# Altium PCB untitled.PcbDoc
Units mil, origin at the board's own origin, x right, y up, seen from the top; angles counter-clockwise.
Board outline 3012.01 x 3149.61 mil, 2 copper layers (Top, Bottom), stack 61.811 mil thick; 37 components, 55 nets, 177 pads, 57 vias.
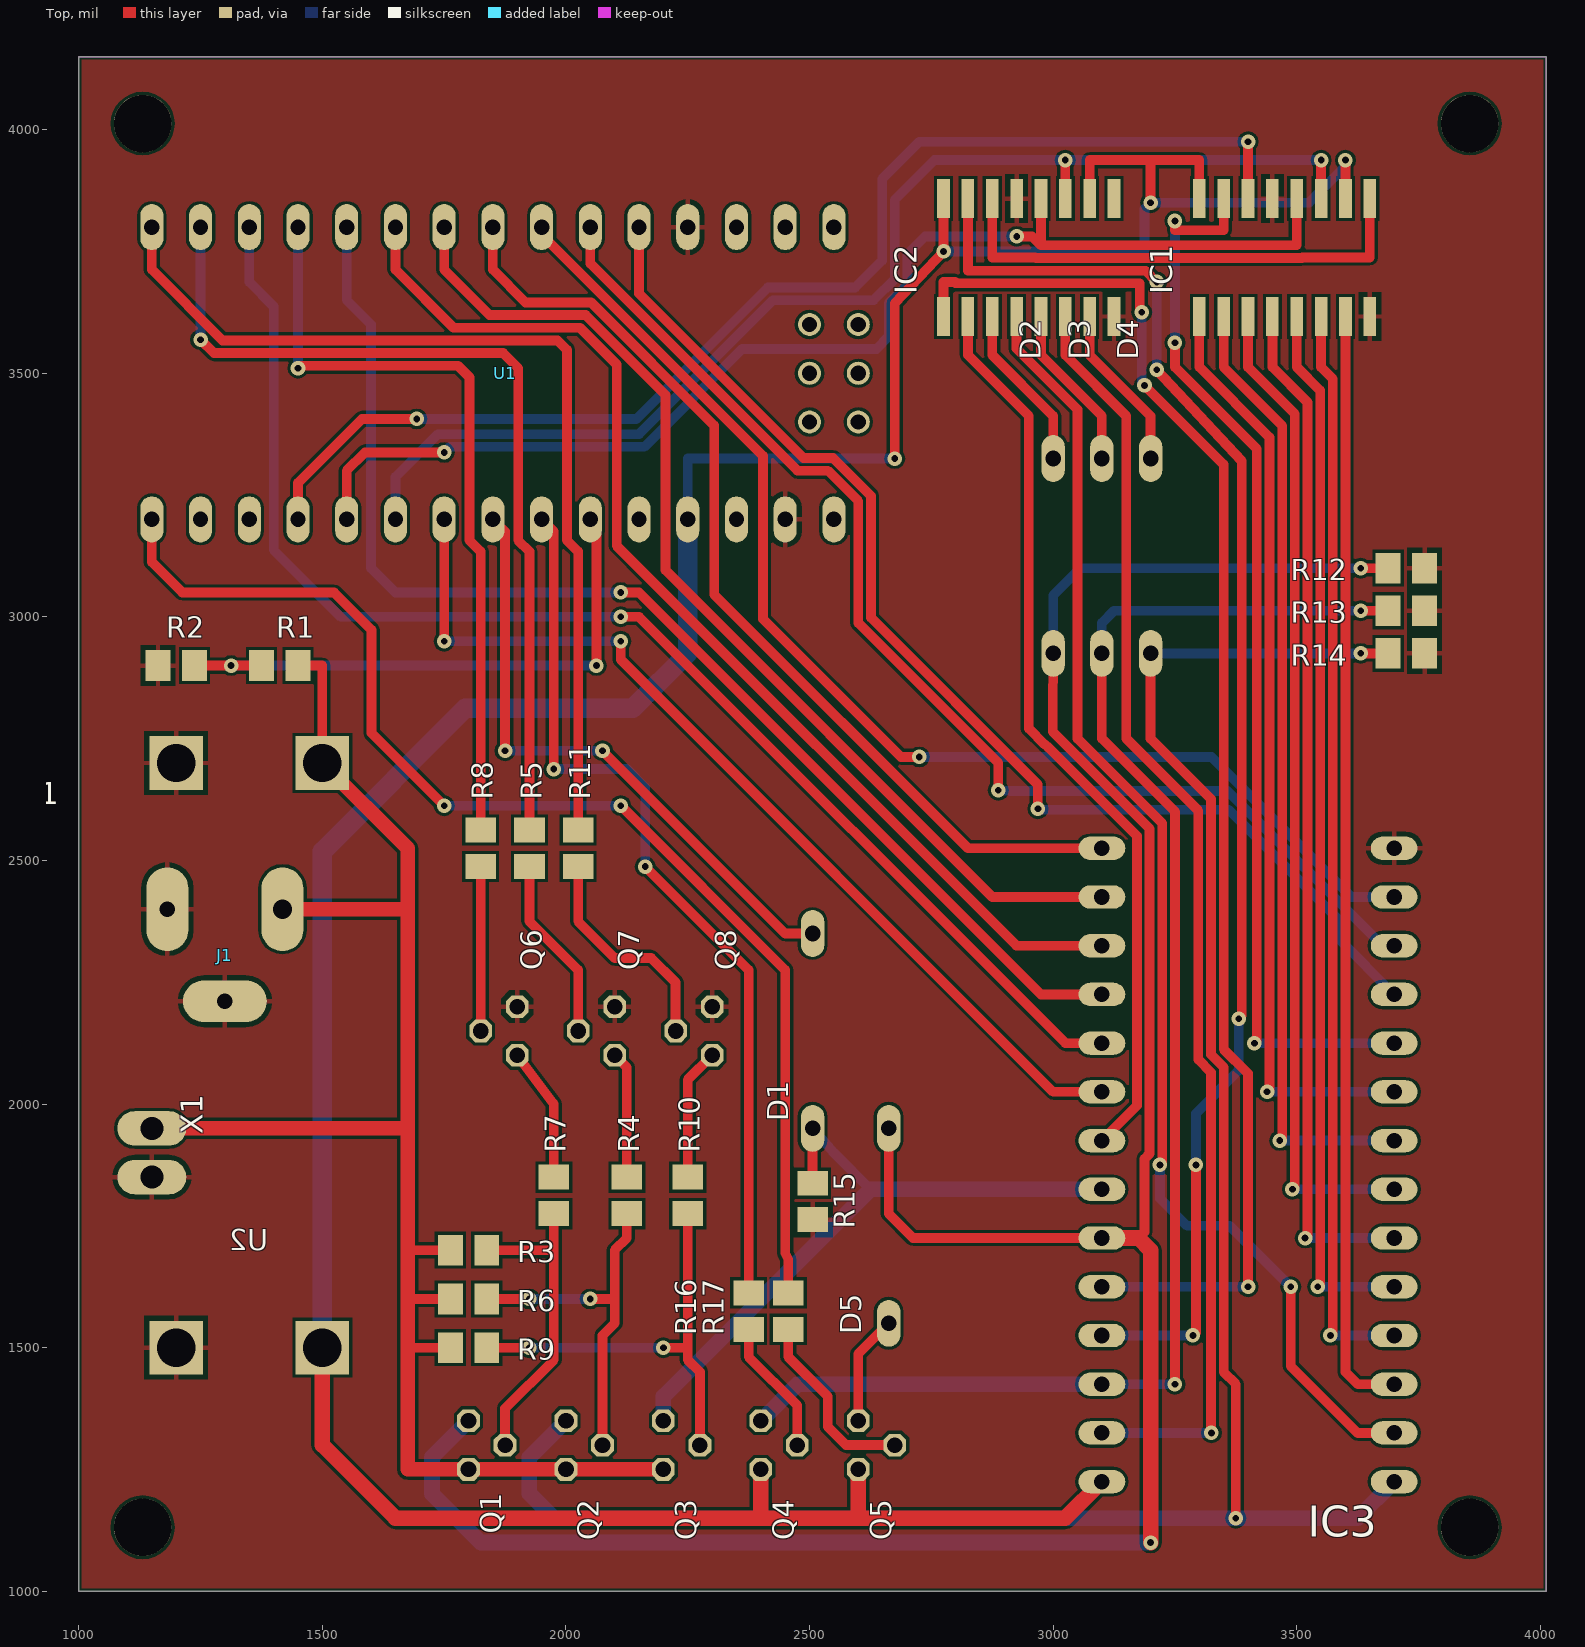
[diagram p0: Top view]
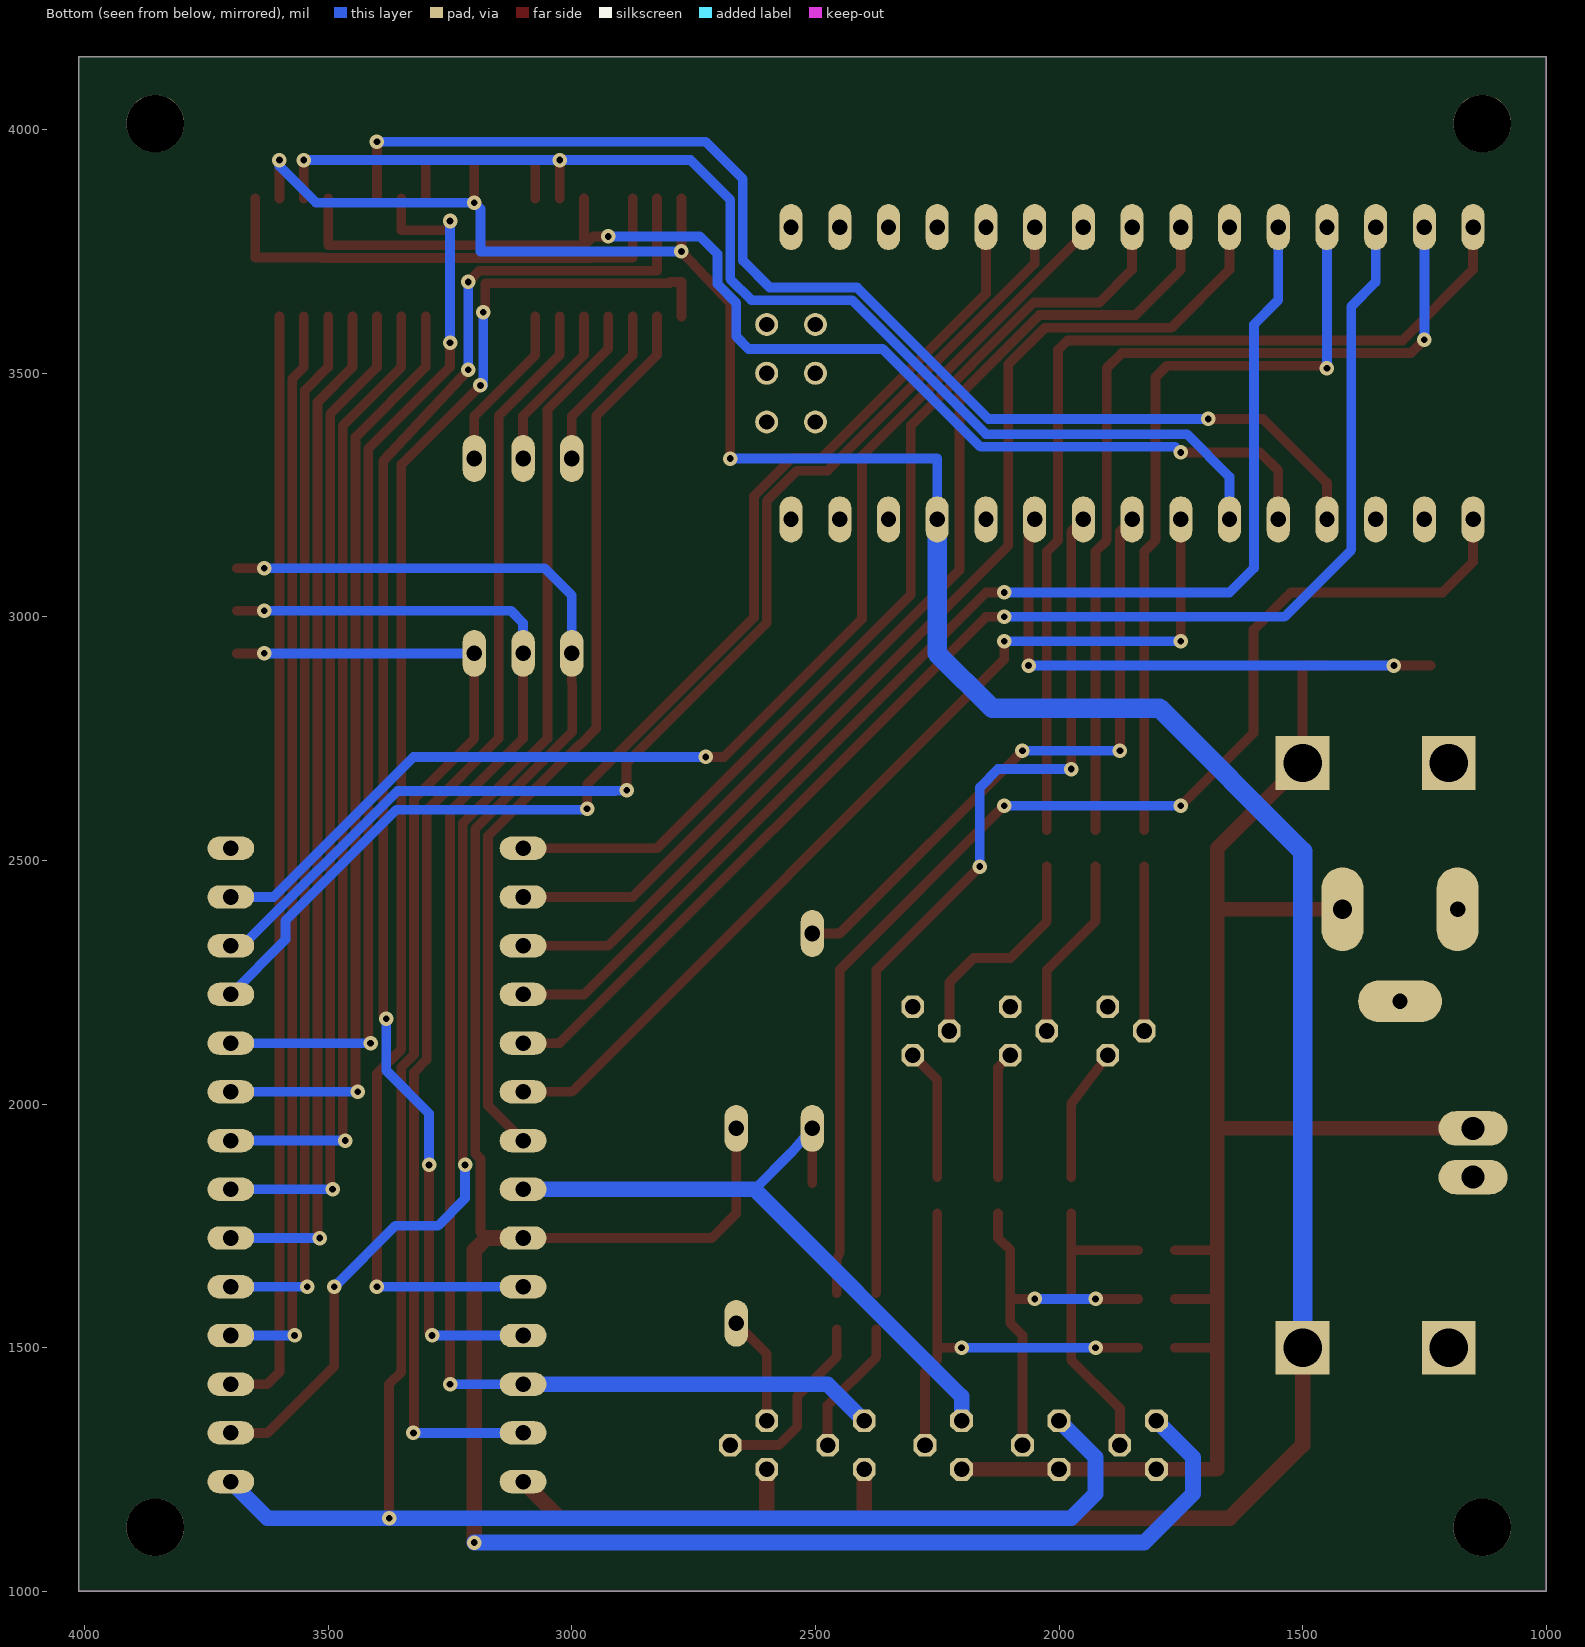
[diagram p1: Bottom view, seen from below]

## Layer stack, top to bottom
Top Solder: solder mask 0.4, Solder Resist, Dk 3.5
Top: signal copper 1.378
Dielectric 1: core 59.0551, FR-4, Dk 4.8
Bottom: signal copper 1.378
Bottom Solder: solder mask 0.4, Solder Resist, Dk 3.5

## Board outline
1000,1000 4012.01,1000 4012.01,4149.61 1000,4149.61

## Design rules (kind name [scope] priority, off if disabled: settings)
Clearance [All] p1: gap=6 ignorepadtopadclearanceinfootprint=FALSE except(0: SMDPad-SMDPad SMDPad-THPad SMDPad-Via)
Clearance "Clearance (Same Net)" [All] p2: gap=0 ignorepadtopadclearanceinfootprint=FALSE except(6: SMDPad-SMDPad SMDPad-THPad SMDPad-Via)
HoleSize HoleSize_1 [All] p1: absolutevalues=TRUE maxlimit=100000 minlimit=13.78 maxpercent=80.000 minpercent=20.000
HoleSize [All] p2: absolutevalues=TRUE maxlimit=100 minlimit=1 maxpercent=80.000 minpercent=20.000
HoleToHoleClearance mdViaViaSameLayer [All] p1: gap=6 allowstackedmicrovias=TRUE
HoleToHoleClearance [All] p2: gap=10 allowstackedmicrovias=TRUE
PasteMaskExpansion mlMinCreamFrame [All] p1: expansion=0
PasteMaskExpansion [All] p2: expansion=0
PolygonConnect ThermalVias [IsVia] p1: connectstyle=Direct reliefconductorwidth=10 reliefentries=4 polygonreliefangle="90 Angle" airgapwidth=10
PolygonConnect [All] p2: connectstyle=Relief reliefconductorwidth=10 reliefentries=4 polygonreliefangle="90 Angle" airgapwidth=10
RoutingVias [All] p1: holewidth=28 width=50 viastyle="Through Hole" minholewidth=28 minwidth=50 maxholewidth=28 maxwidth=50
SilkToSilkClearance [All] p1 off: silktosilkclearance=10
SilkToSolderMaskClearance [IsPad] p1 off: minsilkscreentomaskgap=10 clearancetoexposedcopper=TRUE
SolderMaskExpansion mlMinStopFrame [All] p1: expansion=4
SolderMaskExpansion [All] p2: expansion=4
Width Width_1 [All] p1: maxlimit=100000 minlimit=6 preferedwidth=10
Width [All] p2: maxlimit=10 minlimit=10 preferedwidth=10
25 further rules are at their usual default settings.

## Components (designator, comment, footprint, x,y, rotation, side; value= is the part's Value field where it differs from the comment)
D1 "" DO35-10 2506.25,2150 r90 top
D2 "" DO35-10 3000,3125 r90 top
D3 "" DO35-10 3100,3125 r90 top
D4 "" DO35-10 3200,3125 r90 top
D5 "" DO35-10 2662.5,1750 r270 top
IC1 "74HC595D" SO16 3475,3737.5 r0 top
IC2 "74HC595D" SO16 2950,3737.5 r0 top
IC3 "" DIL28 3400,1875 r90 top
J1 "" SPC4078 1300,2400 r0 top
Q1 "BC557" TO92 1800,1300 r270 top
Q2 "" TO92 2000,1300 r270 top
Q3 "" TO92 2200,1300 r270 top
Q4 "" TO92 2400,1300 r270 top
Q5 "" TO92 2600,1300 r270 top
Q6 "BC547" TO92 1900,2150 r90 top
Q7 "" TO92 2100,2150 r90 top
Q8 "" TO92 2300,2150 r90 top
R1 "" M0805 1412.5,2900 r180 top
R2 "" M0805 1200,2900 r180 top
R3 "22K" M0805 1800,1700 r180 top
R4 "" M0805 2125,1812.5 r270 top
R5 "22K" M0805 1925,2525 r90 top
R6 "" M0805 1800,1600 r180 top
R7 "" M0805 1975,1812.5 r90 top
R8 "" M0805 1825,2525 r270 top
R9 "" M0805 1800,1500 r180 top
R10 "" M0805 2250,1812.5 r90 top
R11 "" M0805 2025,2525 r270 top
R12 "4.7K" M0805 3725,3100 r0 top
R13 "" M0805 3725,3012.5 r0 top
R14 "" M0805 3725,2925 r0 top
R15 "4.7K" M0805 2506.25,1800 r270 top
R16 "300" M0805 2375,1575 r270 top
R17 "" M0805 2456.25,1575 r270 top
U1 "" NANO 2200,3600 r90 top
U2 "DC-DC-STEP-UP-MT3608" DC-DC-STEP-UP-MT3608 1350,2100 r270 top
X1 "" 2POL254 1150,1900 r270 top

## Footprints (in the part's own frame and the unit in brackets; to place one, negate y for a bottom-side part, rotate by r counter-clockwise, add the part's x,y. Pads: shape width x height; smd on the part's side, far side on the other; paste and mask are expansions set on the pad)
2POL254 [mil] "2POL254"
  oval 70.86x141.72 hole 47.24: 1(-50,0) 2(50,0)
DC-DC-STEP-UP-MT3608 [mm] "DC-DC-STEP-UP-MT3608"
  rect 2.8x2.8 hole 2: IN+(15.24,3.81) IN-(15.24,-3.81) OUT+(-15.24,3.81) OUT-(-15.24,-3.81)
DIL28 [mil] "DIL28"
  oval 48x96 hole 32: 1(-650,-300) 2(-550,-300) 3(-450,-300) 4(-350,-300) 5(-250,-300) 6(-150,-300) 7(-50,-300) 8(50,-300) 9(150,-300) 10(250,-300) 11(350,-300) 12(450,-300) 13(550,-300) 14(650,-300) 15(650,300) 16(550,300) 17(450,300) 18(350,300) 19(250,300) 20(150,300) 21(50,300) 22(-50,300) 23(-150,300) 24(-250,300) 25(-350,300) 26(-450,300) 27(-550,300) 28(-650,300)
DO35-10 [mil] "DO35-10"
  oval 96x48 hole 32: A(200,0) C(-200,0)
M0805 [mil] "M0805"
  rect 51.18x62.99 smd: 1(-37.4,0) 2(37.4,0)
NANO [mil] "NANO"
  oval 94.5x47.25 hole 31.5: 3.3V(-400,950) 5V(-400,-50) A0(-400,750) A1(-400,650) A2(-400,550) A3(-400,450) A4(-400,350) A5(-400,250) A6(-400,150) A7(-400,50) AREF(-400,850) D2(200,50) D3(200,150) D4(200,250) D5(200,350) D6(200,450) D7(200,550) D8(200,650) D9(200,750) D10(200,850) D11(200,950) D12(200,1050) D13(-400,1050) GND(-400,-250) GND1(200,-50) RAW(-400,-350) RST(-400,-150) RST1(200,-150) RX1(200,-250) TX0(200,-350)
  round 47.25 hole 31.5: ICSP1(-200,-400) ICSP2(-200,-300) ICSP3(-100,-400) ICSP4(-100,-300) ICSP5(0,-400) ICSP6(0,-300)
SO16 [mil] "SO16"
  rect 26x80 smd: 1(-175,-121) 2(-125,-121) 3(-75,-121) 4(-25,-121) 5(25,-121) 6(75,-121) 7(125,-121) 8(175,-121) 9(175,121) 10(125,121) 11(75,121) 12(25,121) 13(-25,121) 14(-75,121) 15(-125,121) 16(-175,121)
SPC4078 [mil] "SPC4078"
  oval 86x172 hole 31.5: 1(-118.11,0)
  oval 172x86 hole 31.5: 2(0,-188.98)
  oval 86x172 hole 39.37: 3(118.11,0)
TO92 [mil] "TO92"
  oct 46.48x46.48 hole 32: 1(50,0) 2(0,75) 3(-50,0)

## Part data
D1 D2 D3 D4 D5: library part DO35-10
IC1 IC2: library part SO16
IC3: library part DIL28
J1: library part SPC4078
Q1 Q2 Q3 Q4 Q5 Q6 Q7 Q8: library part TO92
R1 R2 R3 R4 R5 R6 R7 R8 R9 R10 R11 R12 R13 R14 R15 R16 R17: library part M0805
U1: library part NANO
X1: library part 2POL254

## Free pads (board coordinates)
  round 118.11 hole 118.11: 1(1131.25,1131.25) 1(1131.25,4012.5) 1(3855.02,1131.25) 1(3855.02,4012.5)

## Via types
v1: diameter 29.78/29.78 (per signal layer), hole 13.78, Top to Bottom, 57 vias

## Nets (pads, with @x,y where several pads share a name; then routed paths per layer and width w, separated by ;. In a path a pad name is that pad's centre, name@x,y a point inside that pad or via, vN(x,y) a via of type N, cw(c..) or ccw(c..) an arc to the next point about the centre after c; other vN are vias at no path point)
+24V: J1.3 Q1.1 Q2.1 Q3.1 R1.1 R3.2 R6.2 R9.2 U2.OUT+ X1.1 | length 3342.3
  Top w20: R1.1 1500,2900 U2.OUT+ ; 1675,1500 R9.2 ; 1675,1600 R6.2 ; 1675,1700 R3.2
  Top w30: X1.1 1675,1950 ; J1.3 1675,2400 ; U2.OUT+ 1675,2525 1675,2400 ; Q3.1 Q2.1 Q1.1 1675,1250 1675,1500 1675,1600 1675,1700 1675,1950 ; 1675,1950 1675,2400
A0: IC1.15 IC3.10 | length 2229.5
  Top w20: v1(3250,3562.5) 3250,3512.5 3418,3344.5 3418,2129.89 v1(3413.11,2125) ; v1(3250,3812.5) 3250,3793.75 3350,3793.75 IC1.15
  Bottom w20: v1(3250,3562.5) v1(3250,3812.5) ; v1(3413.11,2125) IC3.10
A1: IC1.1 IC3.9 | length 1914.1
  Top w20: IC1.1 3300,3512.5 3444,3368.5 3444,2029.89 v1(3439.11,2025)
  Bottom w20: v1(3439.11,2025) IC3.9
A2: IC1.2 IC3.8 | length 1978.1
  Top w20: IC1.2 3350,3512.5 3470,3392.5 3470,1929.89 v1(3465.11,1925)
  Bottom w20: v1(3465.11,1925) IC3.8
A3: IC1.3 IC3.7 | length 2042.2
  Top w20: IC1.3 3400,3512.5 3496,3416.5 3496,1829.89 v1(3491.11,1825)
  Bottom w20: v1(3491.11,1825) IC3.7
A4: IC1.4 IC3.6 | length 2106.2
  Top w20: IC1.4 3450,3512.5 3522,3440.5 3522,1729.89 v1(3517.11,1725)
  Bottom w20: v1(3517.11,1725) IC3.6
A5: IC1.5 IC3.5 | length 2170.3
  Top w20: IC1.5 3500,3512.5 3548,3464.5 3548,1629.89 v1(3543.11,1625)
  Bottom w20: v1(3543.11,1625) IC3.5
A6: IC1.6 IC3.4 | length 2234.4
  Top w20: IC1.6 3550,3512.5 3574,3488.5 3574,1529.89 v1(3569.11,1525)
  Bottom w20: v1(3569.11,1525) IC3.4
A7: IC1.7 IC3.3 | length 2276.9
  Top w20: IC1.7 3600,1450 3625,1425 IC3.3
A8: IC2.15 IC3.25 | length 3004.7
  Top w20: IC2.15 2825,3710.5 3189.5,3710.5 v1(3212.5,3687.5) ; v1(3212.5,3506.93) 3387.11,3319.82 3387.11,2181.22 v1(3380.89,2175) ; v1(3286.89,1525) 3293.11,1531.22 v1(3293.11,1875)
  Bottom w20: IC3.25 v1(3286.89,1525) ; v1(3212.5,3506.93) v1(3212.5,3687.5) ; v1(3293.11,1875) 3293.11,1980.61 3380.89,2068.39 v1(3380.89,2175)
A9: IC2.1 IC3.24 | length 2931.7
  Top w20: IC2.1 2775,3687.5 2799,3687.5 2799,3684.5 3177.61,3684.5 3177.61,3629 v1(3181.61,3625) ; v1(3187.5,3475) 3350,3312.5 3350,2112.5 3400,2062.5 v1(3400,1625)
  Bottom w20: IC3.24 v1(3400,1625) ; v1(3181.61,3625) 3181.61,3475 v1(3187.5,3475)
A10: IC2.2 IC3.21 | length 1865.4
  Top w20: IC2.2 2825,3537.5 2950,3412.5 2950,2770.85 2982.6,2738.25 2990,2732 3172,2550 3172,1997 IC3.21
A11: D2.C D5.C IC3.23 Q1.3 R12.1 | length 5162.7
  Top w20: D5.C 2662.5,1775 2712.5,1725 IC3.23 ; D2.C 2999,2801 2999,2764.23 3198,2565.23 3198,1898 3187.5,1887.5 3187.5,1737.5 3175,1725 ; v1(3631.25,3100) R12.1
  Top w32: IC3.23 3175,1725 3200,1700 v1(3200,1100)
  Bottom w20: D2.C 3000,3043.75 3056.25,3100 v1(3631.25,3100)
  Bottom w32: Q1.3 1725,1275 1725,1200 1825,1100 v1(3200,1100)
A12: IC2.4 IC3.2 | length 2711.8
  Top w20: IC2.4 2925,3550.73 3050,3425.73 3050,2750 3224,2576 3224,1879.89 v1(3219.11,1875) ; v1(3487.5,1625) 3487.5,1462.5 3625,1325 IC3.2
  Bottom w20: v1(3219.11,1875) 3219.11,1805.89 3275,1750 3362.5,1750 v1(3487.5,1625)
A13: D3.C IC3.26 Q4.3 R13.1 | length 3103.7
  Top w20: D3.C 3100,2750 3250,2600 v1(3250,1425) ; v1(3631.25,3012.5) R13.1
  Bottom w20: IC3.26 v1(3250,1425) ; D3.C 3100,2987.5 3125,3012.5 v1(3631.25,3012.5)
  Bottom w32: Q4.3 2475,1425 IC3.26
A14: IC2.6 IC3.27 | length 2640.8
  Top w20: IC2.6 3025,3537.5 3150,3412.5 3150,2750 3298,2602 3298,2090.96 3324,2064.96 3324,1326 v1(3325,1325)
  Bottom w20: IC3.27 v1(3325,1325)
A15: D4.C IC3.1 Q2.3 R14.1 | length 4342.9
  Top w20: D4.C 3200,2750 3324,2626 3324,2101.73 3350,2075.73 3350,1450 3375,1425 v1(3375,1150) ; v1(3631.25,2925) R14.1
  Bottom w20: D4.C v1(3631.25,2925)
  Bottom w32: Q2.3 1925,1275 1925,1200 1975,1150 v1(3375,1150) 3625,1150 IC3.1
CE: IC3.20 U1.A3 | length 2005.1
  Top w20: v1(1750,2950) U1.A3 ; v1(2112.5,2950) 2112.5,2912.5 3000,2025 IC3.20
  Bottom w20: v1(1750,2950) v1(2112.5,2950)
D0: IC3.11 U1.D2 | length 2480.1
  Top w20: U1.D2 2150,3663.5 2487.5,3326 2548.27,3326 2626,3248.27 2626,2998.27 2968.39,2655.88 2968.39,2606.61 v1(2968.75,2606.25)
  Bottom w20: v1(2968.75,2606.25) 2973,2604.25 3359.71,2604.25 3587.5,2376.46 3587.5,2337.5 IC3.11
D1: IC3.12 U1.D3 | length 2483.6
  Top w20: U1.D3 2050,3725 2475,3300 2537.5,3300 2600,3237.5 2600,2987.5 2887.5,2700 v1(2887.5,2644.11)
  Bottom w20: v1(2887.5,2644.11) 2911.14,2642.75 3357.98,2642.75 3675.73,2325 IC3.12
D2: IC3.13 U1.D4 | length 2524.6
  Top w20: U1.D4 1950,3784.79 2404.25,3330.54 2404.25,2995.75 2687.5,2712.5 v1(2725,2712.5)
  Bottom w20: v1(2725,2712.5) 3325,2712.5 3612.5,2425 IC3.13
D3: IC3.15 U1.D5 | length 2032.8
  Top w20: U1.D5 1850,3712.5 1917.11,3645.39 2051.9,3645.39 2304.25,3393.04 2304.25,3045.75 2825,2525 IC3.15
D4: IC3.16 U1.D6 | length 2181.6
  Top w20: U1.D6 1750,3712.5 1843.11,3619.39 2040.4,3619.39 2204.25,3455.54 2204.25,3095.75 2875,2425 IC3.16
D5: IC3.17 U1.D7 | length 2330.3
  Top w20: U1.D7 1650,3712.5 1769.11,3593.39 2028.9,3593.39 2104.25,3518.04 2104.25,3145.75 2925,2325 IC3.17
D6: IC3.18 U1.D8 | length 2583.1
  Top w20: v1(2112.5,3050) 2150,3050 2975,2225 IC3.18
  Bottom w20: U1.D8 1550,3650 1600,3600 1600,3100 1650,3050 v1(2112.5,3050)
D7: IC3.19 U1.D10 | length 2802.6
  Top w20: v1(2112.5,3000) 2150,3000 3025,2125 IC3.19
  Bottom w20: U1.D10 1350,3687.5 1400,3637.5 1400,3137.5 1537.5,3000 v1(2112.5,3000)
GND: IC1.8 IC1.13 IC2.8 IC2.13 IC3.14 J1.1 J1.2 Q6.1 Q7.1 Q8.1 R2.2 R12.2 R13.2 R14.2 R15.2 U1.GND U1.GND1 U2.IN- U2.OUT- X1.2
N$1: IC1.11 IC2.11 U1.A2 | length 2509.9
  Top w20: IC2.11 v1(3025,3937.5) ; IC1.11 v1(3550,3937.5)
  Bottom w20: U1.A2 1650,3287.5 1737.5,3375 2150,3375 2425,3650 2631.25,3650 2675,3693.75 2675,3856.25 2756.25,3937.5 v1(3025,3937.5) v1(3550,3937.5)
N$2: IC1.12 IC2.12 U1.A1 | length 2525.7
  Top w20: U1.A1 1550,3300 1587.5,3337.5 v1(1750,3337.5) ; v1(2925,3780.89) 2956.61,3780.89 2975,3762.5 ; IC2.12 2975,3762.5 ; IC1.12 3500,3762.5 2975,3762.5
  Bottom w20: v1(1750,3337.5) 1761.5,3349 2160.77,3349 2361.77,3550 2637.5,3550 2662.5,3575 2662.5,3644.48 2701,3682.98 2701,3744.75 2737.14,3780.89 v1(2925,3780.89)
N$3: IC1.9 IC2.14 | length 1017.8
  Top w20: IC2.14 2875,3737.5 2963.23,3737.5 2964.23,3736.5 3510.77,3736.5 3511.77,3737.5 3650,3737.5 IC1.9
N$4: IC1.14 U1.A0 | length 2529.7
  Top w20: U1.A0 1450,3275 1581.25,3406.25 v1(1693.75,3406.25) ; IC1.14 v1(3400,3975)
  Bottom w20: v1(1693.75,3406.25) 2144.48,3406.25 2414.23,3676 2562.5,3676 2563.5,3676 2593.75,3676 2649,3731.25 2649,3899 2725,3975 v1(3400,3975)
N$5: D2.A IC2.3 | length 343.3
  Top w20: IC2.3 2875,3537.5 3000,3412.5 D2.A
N$6: D3.A IC2.5 | length 343.3
  Top w20: IC2.5 2975,3537.5 3100,3412.5 D3.A
N$7: R8.1 U1.D9 | length 1592.2
  Top w20: v1(1450,3510.5) 1454.89,3515.39 1778.36,3515.39 1802,3491.75 1802,3156.96 1825,3133.96 R8.1
  Bottom w20: v1(1450,3510.5) U1.D9
N$8: D1.A U1.A4 | length 1271.9
  Top w20: U1.A4 1875,3175 v1(1875,2725) ; v1(2075,2725) 2450,2350 D1.A
  Bottom w20: v1(1875,2725) v1(2075,2725)
N$9: R1.2 R2.1 U1.A6 | length 1192.9
  Top w20: R2.1 v1(1312.5,2900) R1.2 ; U1.A6 2062.5,3187.5 v1(2062.5,2900)
  Bottom w20: v1(1312.5,2900) v1(2062.5,2900)
N$10: R16.1 U1.A5 | length 1851.5
  Top w20: U1.A5 1975,3175 v1(1975,2687.5) ; v1(2162.5,2487.5) 2375,2275 R16.1
  Bottom w20: v1(1975,2687.5) 2125,2687.5 2162.5,2650 v1(2162.5,2487.5)
N$11: R5.2 U1.D11 | length 1865
  Top w20: v1(1250.03,3568.78) 1277.43,3541.39 1871.11,3541.39 1902,3510.5 1902,3156.96 1925,3133.96 R5.2
  Bottom w20: v1(1250.03,3568.78) U1.D11
N$12: R17.1 U1.D13 | length 2522.5
  Top w20: U1.D13 1150,3112.5 1212.5,3050 1524.27,3050 1601,2973.27 1601,2761.5 v1(1750,2612.5) ; v1(2112.5,2612.5) 2450,2275 2450,1693.75 2456.25,1681.25 R17.1
  Bottom w20: v1(1750,2612.5) v1(2112.5,2612.5)
N$13: R11.1 U1.D12 | length 2002.8
  Top w20: U1.D12 1150,3712.5 1295.11,3567.39 1982.61,3567.39 2002,3548 2002,3156.96 2025,3133.96 R11.1
N$14: D4.A IC2.7 | length 343.3
  Top w20: IC2.7 3075,3537.5 3200,3412.5 D4.A
N$15: D5.A Q5.3 | length 225.9
  Top w20: Q5.3 2600,1487.5 D5.A
N$16: Q8.3 R10.2 | length 270.8
  Top w20: R10.2 2250,2050 Q8.3
N$17: Q3.2 R9.1 R10.1 | length 898.1
  Top w20: R9.1 v1(1925,1500) ; v1(2200,1500) 2250,1500 ; R10.1 2250,1500 ; Q3.2 2275,1450 2250,1475 2250,1500
  Bottom w20: v1(1925,1500) v1(2200,1500)
N$18: Q8.2 R11.2 | length 464.4
  Top w20: R11.2 2025,2375 2100,2300 2175,2300 2225,2250 Q8.2
N$19: Q7.3 R4.1 | length 260.5
  Top w20: Q7.3 2125,2075 R4.1
N$20: Q2.2 R4.2 R6.1 | length 758.4
  Top w20: R6.1 v1(1925,1600) ; v1(2050,1600) 2100,1600 ; Q2.2 2075,1525 2100,1550 2100,1600 ; R4.2 2125,1725 2100,1700 2100,1600
  Bottom w20: v1(1925,1600) v1(2050,1600)
N$21: Q7.2 R5.1 | length 379
  Top w20: R5.1 1925,2375 2025,2275 Q7.2
N$22: Q6.3 R7.2 | length 275.1
  Top w20: Q6.3 1975,2000 R7.2
N$23: Q1.2 R3.1 R7.1 | length 654.1
  Top w20: R3.1 1975,1700 ; Q1.2 1875,1375 1975,1475 1975,1700 ; R7.1 1975,1700
N$24: Q6.2 R8.2 | length 337.6
  Top w20: Q6.2 R8.2
N$25: Q4.2 R16.2 | length 279
  Top w20: R16.2 2375,1481.25 2475,1381.25 Q4.2
N$26: Q5.2 R17.2 | length 386.8
  Top w20: R17.2 2456.25,1481.25 2537.5,1400 2537.5,1337.5 2575,1300 Q5.2
OE: D1.C IC3.22 Q3.3 R15.1 | length 1411.1
  Top w20: R15.1 D1.C
  Bottom w20: D1.C 2550,1900 2625,1825
  Bottom w32: Q3.3 2200,1400 2625,1825 IC3.22
VCC: IC1.10 IC1.16 IC2.10 IC2.16 IC3.28 Q4.1 Q5.1 U1.5V U2.IN+ | length 6939.1
  Top w20: v1(2675,3325) 2675,3643.75 v1(2775,3750) IC2.16 ; IC2.10 3075,3937.5 3200,3937.5 ; v1(3200,3850) 3200,3937.5 ; IC1.16 3300,3937.5 3200,3937.5 ; IC1.10 v1(3600,3937.5)
  Top w32: U2.IN+ 1500,1300 1650,1150 2400,1150 ; Q4.1 2400,1150 ; Q5.1 2600,1150 ; IC3.28 3025,1150 2600,1150 ; 2400,1150 2600,1150
  Bottom w20: U1.5V 2250,3325 v1(2675,3325) ; v1(2775,3750) 3187.5,3750 3187.5,3837.5 v1(3200,3850) 3525,3850 3600,3925 v1(3600,3937.5)
  Bottom w40: U2.IN+ 1500,2518.75 1793.75,2812.5 2137.5,2812.5 2250,2925 U1.5V
pads on no net: IC2.9 U1.3.3V U1.A7 U1.AREF U1.ICSP1 U1.ICSP2 U1.ICSP3 U1.ICSP4 U1.ICSP5 U1.ICSP6 U1.RAW U1.RST U1.RST1 U1.RX1 U1.TX0

## Polygon pours and split planes (outlines as drawn)
GND on Top "Top-GND" (solid, remove dead copper, pour order 0): 990,4160 4022.5,4160 4022.5,990 990,990

## Keep-outs
Keep-Out Layer:
  the board outline again, w0

## Silkscreen, mask and mechanical layers (free items; w line width, h text height)
Dimension:
  the board outline again, w0

## Text inside footprints (layer, text, board x,y; h text height)
Q1: Assembly Top "1" at 1849.9,1236.7 h77.5 r90; Assembly Top "2" at 1874.9,1291.96 h77.5 r90; Assembly Top "3" at 1849.06,1352.57 h77.5 r90
Q2: Assembly Top "1" at 2049.9,1236.7 h77.5 r90; Assembly Top "2" at 2074.9,1291.96 h77.5 r90; Assembly Top "3" at 2049.06,1352.57 h77.5 r90
Q3: Assembly Top "1" at 2249.9,1236.7 h77.5 r90; Assembly Top "2" at 2274.9,1291.96 h77.5 r90; Assembly Top "3" at 2249.06,1352.57 h77.5 r90
Q4: Assembly Top "1" at 2449.9,1236.7 h77.5 r90; Assembly Top "2" at 2474.9,1291.96 h77.5 r90; Assembly Top "3" at 2449.06,1352.57 h77.5 r90
Q5: Assembly Top "1" at 2649.9,1236.7 h77.5 r90; Assembly Top "2" at 2674.9,1291.96 h77.5 r90; Assembly Top "3" at 2649.06,1352.57 h77.5 r90
Q6: Assembly Top "2" at 1875,2125 h77.5 r90; Assembly Top "3" at 1900,2065 h77.5 r90; Assembly Top "1" at 1900,2195 h77.5 r90
Q7: Assembly Top "2" at 2075,2125 h77.5 r90; Assembly Top "3" at 2100,2065 h77.5 r90; Assembly Top "1" at 2100,2195 h77.5 r90
Q8: Assembly Top "2" at 2275,2125 h77.5 r90; Assembly Top "3" at 2300,2065 h77.5 r90; Assembly Top "1" at 2300,2195 h77.5 r90
U2: Top Assembly "IN" at 1321.42,1475.17 h77.5; Top Assembly "OUT" at 1279.24,2674.33 h77.5